# Altium PCB Fish and Microchips PCB.PcbDoc
Units mil, origin at the board's own origin, x right, y up, seen from the top; angles counter-clockwise.
Board outline 1930 x 1665 mil, 2 copper layers (Top Layer, Bottom Layer); 32 components, 24 nets, 135 pads, 23 vias.
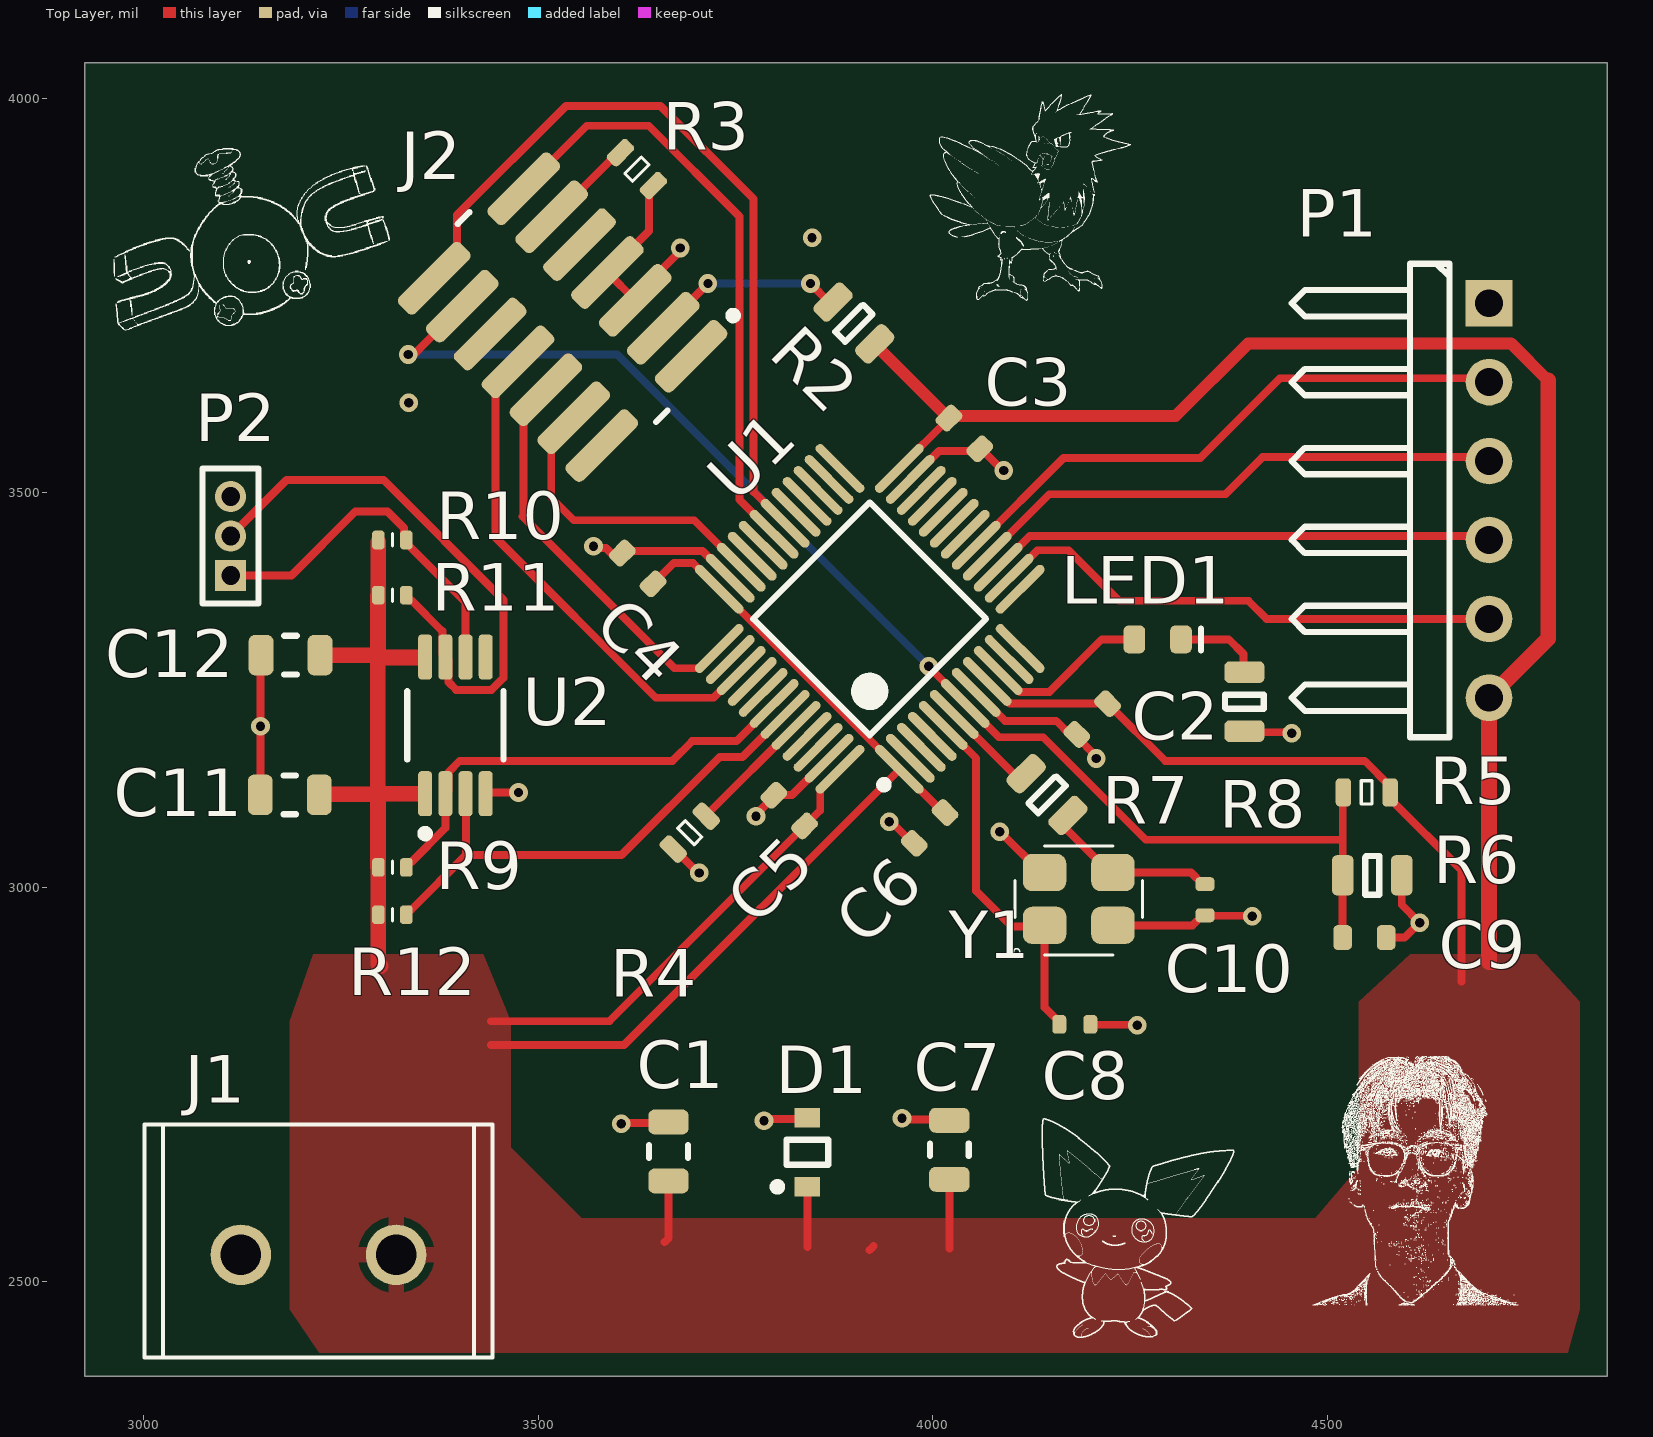
[diagram p0: Top Layer view]
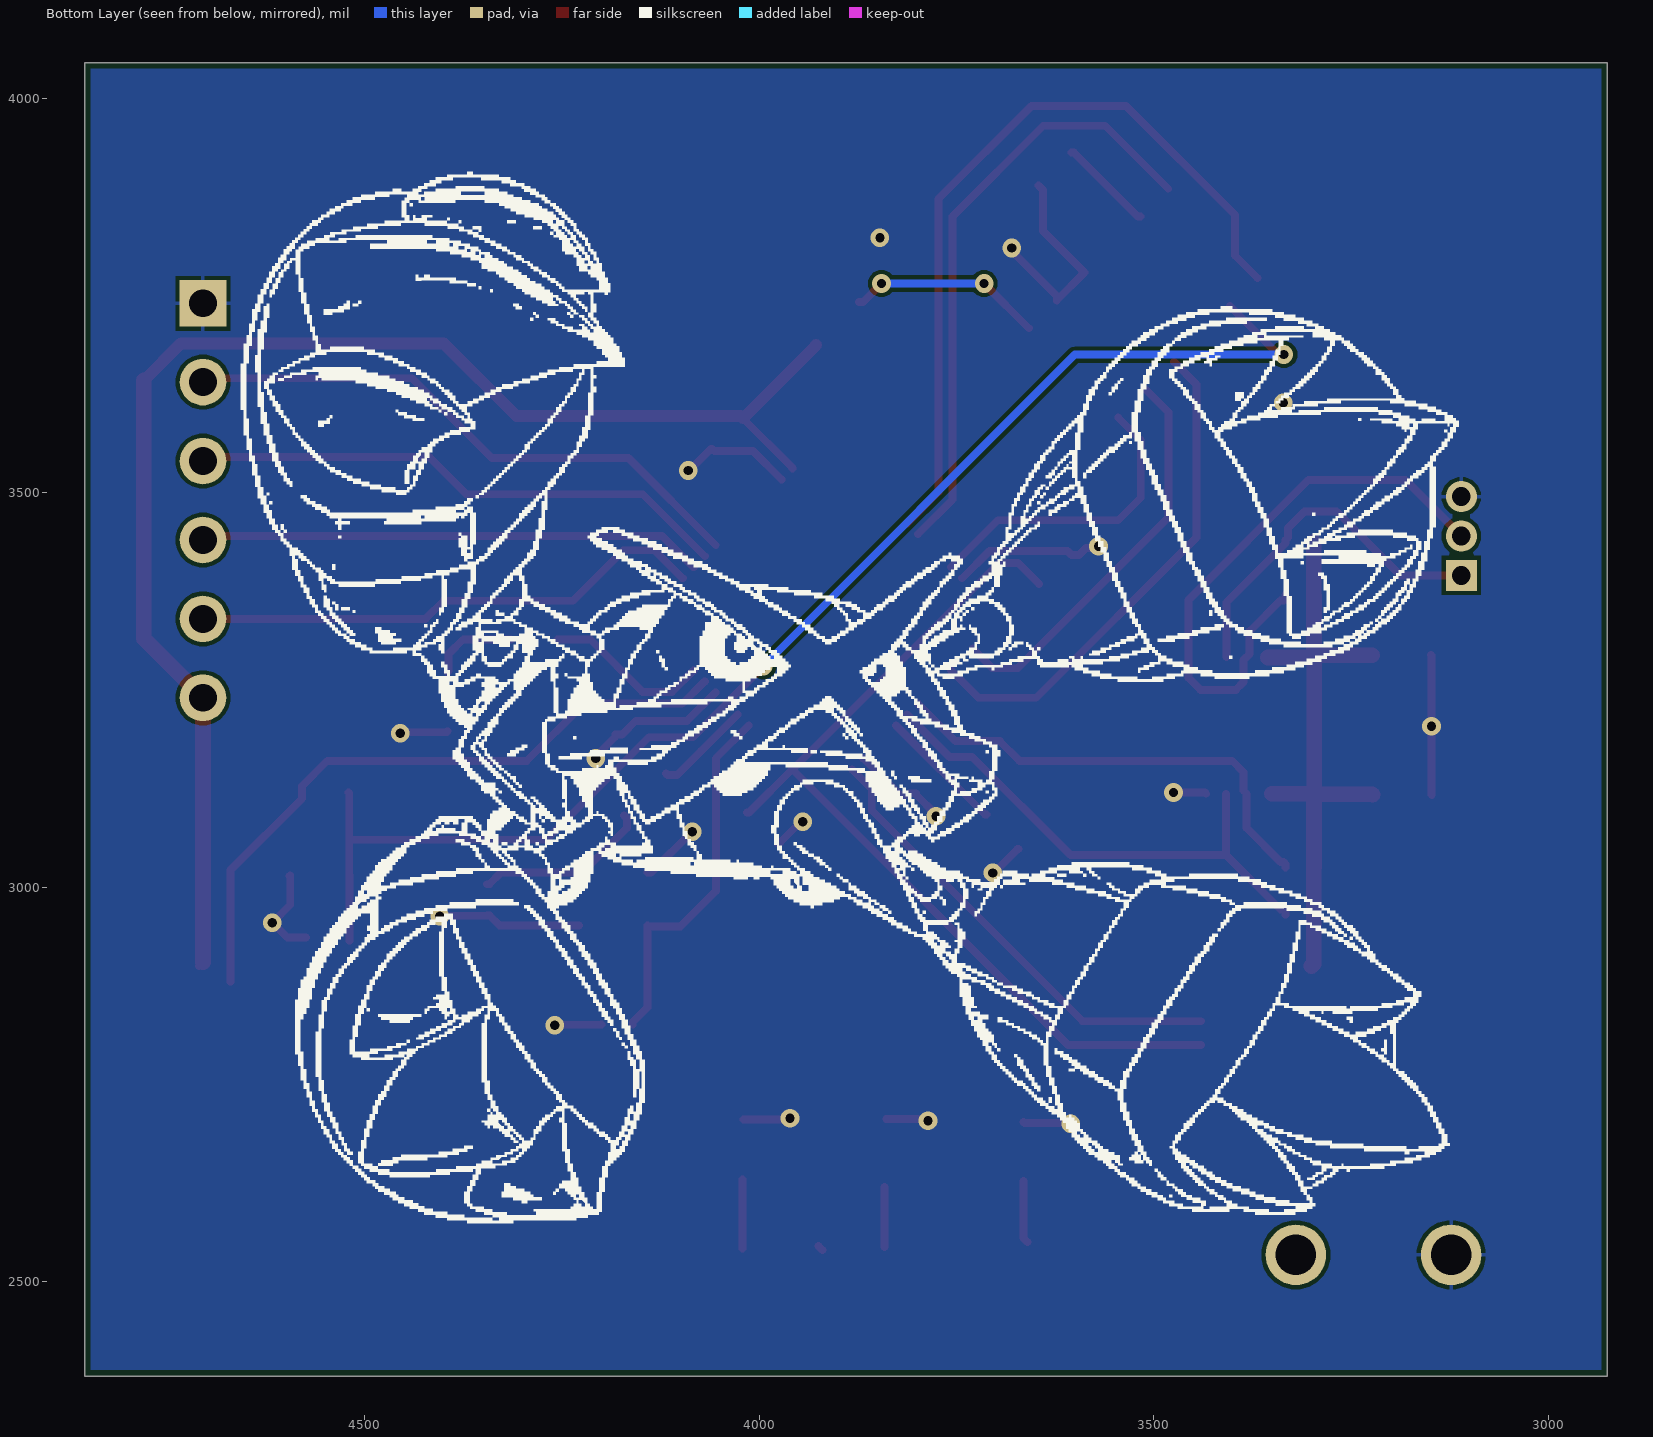
[diagram p1: Bottom Layer view, seen from below]
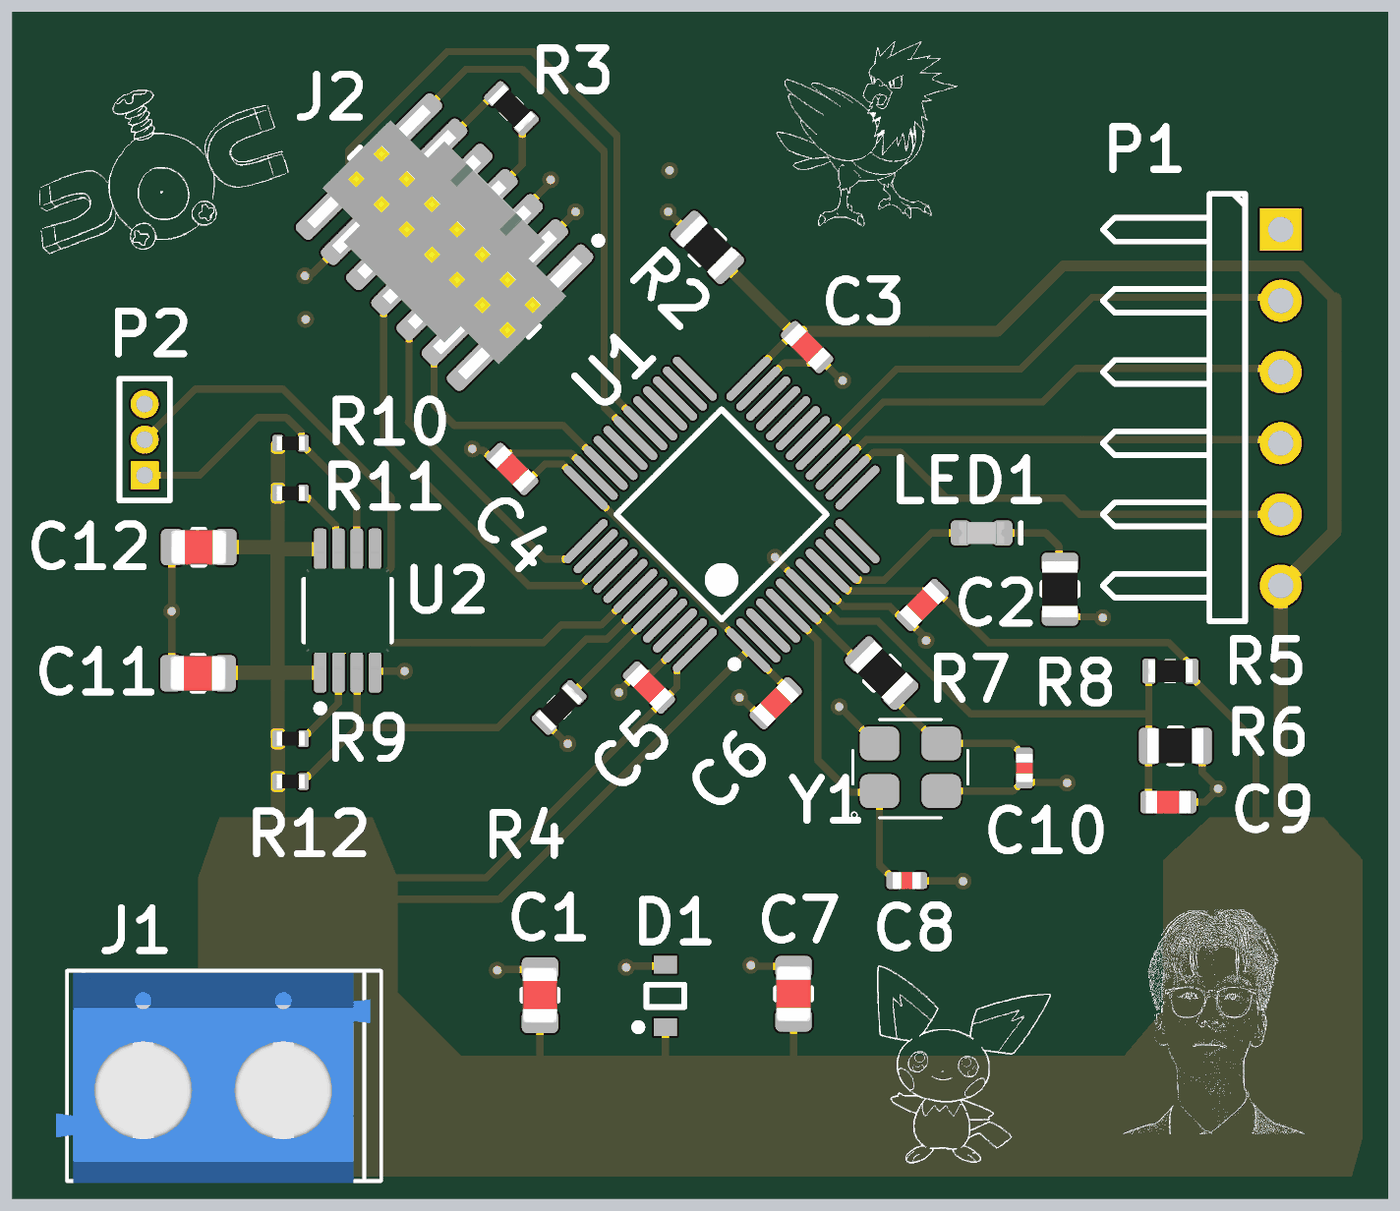
[diagram p2: 3D render of the assembled board from above, using the file's embedded part models]

## Layer stack, top to bottom
Top Solder: solder mask 0.4, Solder Resist, Dk 3.5
Top Layer: signal copper 1.4
Dielectric 1: dielectric 12.6, FR-4, Dk 4.8
Bottom Layer: signal copper 1.4
Bottom Solder: solder mask 0.4, Solder Resist, Dk 3.5

## Board outline
2925,2380 2925,4045 4855,4045 4855,2380

## Design rules (kind name [scope] priority, off if disabled: settings)
BoardOutlineClearance [All] p1: gap=7.87 ignorepadtopadclearanceinfootprint=FALSE
Clearance [All] p1: gap=5 ignorepadtopadclearanceinfootprint=FALSE except(9.84: Arc-Hole Track-Hole SMDPad-Hole THPad-Hole Via-Hole Fill-Hole Poly-Hole Region-Hole Text-Hole)
ComponentClearance [All] p1: gap=5 collisioncheckmode=3 verticalgap=5 showdistances=TRUE
DiffPairsRouting [All] p1: maxlimit=10 minlimit=5 mostfreqgap=5 toplayer_minwidth=5 toplayer_maxwidth=1000 toplayer_prefwidth=5 bottomlayer_minwidth=5 bottomlayer_maxwidth=1000 bottomlayer_prefwidth=5 maxuncoupledlength=500
Height [All] p1: minheight=0 maxheight=71497.94 prefheight=500
HoleSize [All] p1: absolutevalues=TRUE maxlimit=248.03 minlimit=11.81 maxpercent=80.000 minpercent=20.000
HoleToHoleClearance [All] p1: gap=9.84 allowstackedmicrovias=FALSE
MinimumAnnularRing [All] p1: minimumring=3
MinimumSolderMaskSliver [All] p1: minsoldermaskwidth=0
PlaneClearance [All] p1: clearance=5
PlaneConnect PlaneConnectPowerPads [InPadClass('PowerPads')] p1: planeconnectstyle=Direct reliefexpansion=20 reliefentries=4 reliefconductorwidth=10 reliefairgap=10
PlaneConnect [All] p2: pad.planeconnectstyle=Relief pad.reliefexpansion=11.81 pad.reliefentries=4 pad.reliefconductorwidth=5 pad.reliefairgap=5 via.planeconnectstyle=Direct via.reliefexpansion=11.81 via.reliefentries=4 via.reliefconductorwidth=5 via.reliefairgap=5
PolygonConnect PolygonConnectPowerPads [All vs (InPadClass('PowerPads'))] p1: connectstyle=Direct reliefconductorwidth=10 reliefentries=4 polygonreliefangle="90 Angle" airgapwidth=10
PolygonConnect [All] p2: thpad.connectstyle=Relief thpad.reliefconductorwidth=5 thpad.reliefentries=4 thpad.polygonreliefangle="90 Angle" thpad.airgapwidth=5 smdpad.connectstyle=Relief smdpad.reliefconductorwidth=5 smdpad.reliefentries=4 smdpad.polygonreliefangle="90 Angle" smdpad.airgapwidth=5 via.connectstyle=Direct via.reliefconductorwidth=5 via.reliefentries=4 via.polygonreliefangle="90 Angle" via.airgapwidth=5
RoutingVias [All] p1: holewidth=11.81 width=23.62 viastyle="Through Hole" minholewidth=11.81 minwidth=23.62 maxholewidth=23.62 maxwidth=259.84
SilkToSilkClearance [All] p1: silktosilkclearance=0
SilkToSolderMaskClearance [IsPad] p1: minsilkscreentomaskgap=5 clearancetoexposedcopper=TRUE
SolderMaskExpansion [All] p1: expansion=2.95 istentingtop=FALSE
SupplyNets "Schematic Supply Nets_1" [InNet('3V3')] p1: voltage=0.000
SupplyNets "Schematic Supply Nets" [InNet('GND')] p2: voltage=0.000
Width [All] p1: maxlimit=1000 minlimit=5 preferedwidth=5 minimp=50.000000 maximp=50.000000 favimp=50.000000
20 further rules are at their usual default settings.

## Components (designator, comment, footprint, x,y, rotation, side; value= is the part's Value field where it differs from the comment)
C1 "GCM21BR71C225KA64L" CAP0805R 3665,2665 r270 top value=2.2µF
C2 "CGA3E2X7R1E104K080AA" CAP0603R 4202,3213 r45 top value=100nF
C3 "CGA3E2X7R1E104K080AA" CAP0603R 4040,3575 r135 top value=100nF
C4 "CGA3E2X7R1E104K080AA" CAP0603R 3626.02,3403.86 r315 top value=100nF
C5 "CGA3E2X7R1E104K080AA" CAP0603R 3818,3097 r315 top value=100nF
C6 "CGA3E2X7R1E104K080AA" CAP0603R 3996,3075 r45 top value=100nF
C7 "GCM21BR71C105KA58L" CAP0805R 4021,2667 r270 top value=1µF
C8 "GCQ1555C1H100JB01D" CAP0402R 4180,2826 r0 top value=10pF
C9 "CGA3E2X7R1E104K080AA" CAP0603R 4547,2936 r180 top value=100nF
C10 "GCQ1555C1H100JB01D" CAP0402R 4345,2984 r90 top value=10pF
C11 "LMK212B7105KGHTR" CAP0805R 3185,3117 r0 top value=1µF
C12 "LMK212B7105KGHTR" CAP0805R 3186,3294 r0 top value=1µF
D1 "3V3" ONSC-SOD-323-2-477-02_V 3841,2664 r90 top
J1 "691102710002" CON2_SCREW_5.00MM_691102710002 3221.43,2534 r0 top
J2 "FTSH-107-01-L-DV-K" FP-FTSH-107-01-L-DV-K-MFG 3530.94,3722.36 r135 top
LED1 "LT Q39E-Q1OO-25-1" LED0603 4285,3314 r180 top
P1 "Header 6H" HDR1X6H 4705,3740 r270 top
P2 "MHDR1X3" MHDR1X3 3110,3395 r90 top
R2 "ERJ-6GEY0R00V" RES0805R 3900,3715 r135 top value=0
R3 "ERJ-3GEYJ101V" RES0603R 3625,3910 r135 top value=100
R4 "ERJ-3GEYJ103V" RES0603R 3692,3069 r225 top value=10k
R5 "ERJ-3GEYJ103V" RES0603R 4550,3120 r0 top value=10k
R6 "ERJ-6GEY0R00V" RES0805R 4557,3015 r180 top value=0
R7 "ERJ-6GEY0R00V" RES0805R 4144.81,3117.36 r135 top value=0
R8 "CRCW08051K00FKTC" RES0805R 4395,3235 r270 top value=1k
R9 "ERJ-2GEJ472X" RES0402R 3315,3025 r180 top value=4.7k
R10 "ERJ-2GEJ472X" RES0402R 3315,3440 r180 top value=4.7k
R11 "ERJ-2GEJ472X" RES0402R 3315,3370 r180 top value=4.7k
R12 "ERJ-2GEJ472X" RES0402R 3315,2965 r180 top value=4.7k
U1 "STM32F103C8T6" STM-LQFP48_M 3920,3340 r135 top
U2 "TCA9517DGKRQ1" FP-DGK0008A-MFG 3395,3205 r90 top
Y1 "X322516MLB4SI" X322516MLB4SI-Footprint-1 4185,2985 r0 top

## Footprints (in the part's own frame and the unit in brackets; to place one, negate y for a bottom-side part, rotate by r counter-clockwise, add the part's x,y. Pads: shape width x height; smd on the part's side, far side on the other; paste and mask are expansions set on the pad)
CAP0402R [mm] "Capacitor 0402 reflow soldering"
  rrect50% 0.45x0.6 smd: 1(-0.5,0) 2(0.5,0)
  body extent -0.5,-0.3 0.5,0.3, height 0.2
CAP0603R [mm] "capacitor 0603 reflow soldering"
  rrect50% 0.6x0.8 smd: 1(-0.7,0) 2(0.7,0)
  body extent -0.8,-0.4 0.8,0.4, height 0.3
CAP0805R [mm] "capacitor 0805 reflow soldering"
  rrect50% 0.8x1.3 smd: 1(-0.95,0) 2(0.95,0)
  silkscreen extent -0.2,-0.63 0.2,0.63, body extent -1,-0.62 1,0.63, height 0.78
CON2_SCREW_5.00MM_691102710002 [mm] "2-Pos Screw terminal 5mm pitch"
  round 1.95 hole 1.3: 1(-2.5,0) 2(2.5,0)
  silkscreen extent -5.6,-3.3 5.6,4.2, body extent -5.98,-3.37 5.22,4.13, height 10.03
FP-DGK0008A-MFG [mm]
  rrect50% 1.45x0.45 smd: 1(-2.2,0.975) 2(-2.2,0.325) 3(-2.2,-0.325) 4(-2.2,-0.975) 5(2.2,-0.975) 6(2.2,-0.325) 7(2.2,0.325) 8(2.2,0.975)
  silkscreen extent -3.61,-1.55 1.1,1.55, body extent -3.03,-1.8 3.03,1.8, height 0.25
FP-FTSH-107-01-L-DV-K-MFG [mm]
  rrect50% 0.74x2.79 smd: 1(-3.81,-2.035) 2(-3.81,2.035) 3(-2.54,-2.035) 4(-2.54,2.035) 5(-1.27,-2.035) 6(-1.27,2.035) 7(0,-2.035) 8(0,2.035) 9(1.27,-2.035) 10(1.27,2.035) 11(2.54,-2.035) 12(2.54,2.035) 13(3.81,-2.035) 14(3.81,2.035)
  silkscreen extent -4.51,-4.04 4.51,0.27, body extent -4.61,-3.53 4.61,3.53, height 0.25
HDR1X6H [mm] "Connector; Header; 6 Position; Right Angle"
  rect 1.5x1.5 hole 0.9: 1(0,0)
  round 1.5 hole 0.9: 2(2.54,0) 3(5.08,0) 4(7.62,0) 5(10.16,0) 6(12.7,0)
  silkscreen extent -1.27,-6.35 13.97,-1.27
LED0603 [mm] "0603 LED footprint, thick line on the cathode"
  rrect50% 0.7x0.9 smd: 1(-0.75,0) 2(0.75,0)
  silkscreen extent -1.4,-0.35 -1.4,0.35, body extent -0.8,-0.4 0.8,0.4, height 0.34
MHDR1X3 [mm] "Connector; Header; 3 Position"
  rect 1x1 hole 0.6: 1(0,0)
  round 1 hole 0.6: 2(1.27,0) 3(2.54,0)
  silkscreen extent -0.9,-0.9 3.44,0.9
ONSC-SOD-323-2-477-02_V [mm] "SOD, 2-Leads, Body 1.7x1.25mm"
  rect 0.63x0.83 smd: 1(-1.115,0) 2(1.115,0)
  silkscreen extent -1.24,-0.67 0.4,1.09, body extent -0.85,-0.63 0.85,0.63, height 1.06
RES0402R [mm] "resistor 0402 reflow soldering"
  rrect50% 0.4x0.6 smd: 1(-0.45,0) 2(0.45,0)
  silkscreen extent 0,-0.2 0,0.2, body extent -0.5,-0.25 0.5,0.25, height 0.3
RES0603R [mm] "resistor 0603 reflow soldering"
  rrect50% 0.5x0.9 smd: 1(-0.75,0) 2(0.75,0)
  silkscreen extent -0.18,-0.38 0.18,0.38, body extent -0.8,-0.4 0.8,0.4, height 0.45
RES0805R [mm] "resistor 0805 reflow soldering"
  rrect50% 0.7x1.3 smd: 1(-0.95,0) 2(0.95,0)
  silkscreen extent -0.23,-0.63 0.23,0.63, body extent -1,-0.63 1,0.62, height 0.5
STM-LQFP48_M [mm] "QFP, 48-Leads, Body 7x7mm, Pitch 0.5mm, IPC Low Density"
  oval 2.1x0.3 smd: 1(-4.1,2.75) 2(-4.1,2.25) 3(-4.1,1.75) 4(-4.1,1.25) 5(-4.1,0.75) 6(-4.1,0.25) 7(-4.1,-0.25) 8(-4.1,-0.75) 9(-4.1,-1.25) 10(-4.1,-1.75) 11(-4.1,-2.25) 12(-4.1,-2.75) 25(4.1,-2.75) 26(4.1,-2.25) 27(4.1,-1.75) 28(4.1,-1.25) 29(4.1,-0.75) 30(4.1,-0.25) 31(4.1,0.25) 32(4.1,0.75) 33(4.1,1.25) 34(4.1,1.75) 35(4.1,2.25) 36(4.1,2.75)
  oval 0.3x2.1 smd: 13(-2.75,-4.1) 14(-2.25,-4.1) 15(-1.75,-4.1) 16(-1.25,-4.1) 17(-0.75,-4.1) 18(-0.25,-4.1) 19(0.25,-4.1) 20(0.75,-4.1) 21(1.25,-4.1) 22(1.75,-4.1) 23(2.25,-4.1) 24(2.75,-4.1) 37(2.75,4.1) 38(2.25,4.1) 39(1.75,4.1) 40(1.25,4.1) 41(0.75,4.1) 42(0.25,4.1) 43(-0.25,4.1) 44(-0.75,4.1) 45(-1.25,4.1) 46(-1.75,4.1) 47(-2.25,4.1) 48(-2.75,4.1)
  silkscreen extent -4.22,-2.65 2.65,3.57, body extent -3.5,-3.5 3.5,3.5, height 1.6
X322516MLB4SI-Footprint-1 [mm]
  rrect50% 1.4x1.2 smd: 1(-1.1,-0.85) 2(1.1,-0.85) 3(1.1,0.85) 4(-1.1,0.85)
  silkscreen extent -2.1,-1.8 2.05,1.7, body extent -1.62,-1.25 1.63,1.25, height 0.7

## Part data
C1: library part CMP-024-000719-8, "CAP CER 2.2UF 16V X7R 0805", Case/Package="0805 (2012 Metric)", Manufacturer="Murata Electronics", Max Operating Temperature=125°C, Min Operating Temperature=-55°C, Rating=AEC-Q200, Supplier Part Number 1=490-4786-1-ND, Temperature Coefficient=X7R, Tolerance=10%, Voltage Rating=16V, ComponentLink1Description=Datasheet, ComponentLink1URL=https://psearch.en.murata.com/capacitor/product/GCM21BR71C225KA64%23.pdf, PN=GCM21BR71C225KA64L, Supplier 1=Digi-Key
C2 C3 C4 C5 C6 C9: library part CMP-024-000155-8, "CAP CER 0.1UF 25V X7R 0603", Case/Package="0603 (1608 Metric)", Manufacturer="TDK Corporation", Max Operating Temperature=125°C, Min Operating Temperature=-55°C, Rating=AEC-Q200, Supplier Part Number 1=445-5667-1-ND, Temperature Coefficient=X7R, Tolerance=10%, Voltage Rating=25V, ComponentLink1Description=Datasheet, ComponentLink1URL=https://product.tdk.com/info/en/catalog/datasheets/mlcc_automotive_general_en.pdf?ref_disty=digikey, PN=CGA3E2X7R1E104K080AA, Supplier 1=Digi-Key
C7: library part CMP-024-000717-8, "CAP CER 1UF 16V X7R 0805", Case/Package="0805 (2012 Metric)", Manufacturer="Murata Electronics", Max Operating Temperature=125°C, Min Operating Temperature=-55°C, Rating=AEC-Q200, Supplier Part Number 1=490-14437-1-ND, Temperature Coefficient=X7R, Tolerance=10%, Voltage Rating=16V, ComponentLink1Description=Datasheet, ComponentLink1URL=https://search.murata.co.jp/Ceramy/image/img/A01X/G101/ENG/GCM21BR71C105KA58-01.pdf, PN=GCM21BR71C105KA58L, Supplier 1=Digi-Key
C8 C10: library part CMP-024-000761-8, "CAP CER 10PF 50V C0G/NP0 0402", Case/Package="0402 (1005 Metric)", Manufacturer="Murata Electronics", Max Operating Temperature=125°C, Min Operating Temperature=-55°C, Rating=AEC-Q200, Supplier Part Number 1=490-17423-1-ND, Temperature Coefficient="C0G, NP0", Tolerance=5%, Voltage Rating=50V, ComponentLink1Description=Datasheet, ComponentLink1URL=https://search.murata.co.jp/Ceramy/image/img/A01X/G101/ENG/GCQ1555C1H100JB01-01.pdf, PN=GCQ1555C1H100JB01D, Supplier 1=Digi-Key
C11 C12: library part CMP-024-001219-8, "CAP CER 1UF 10V X7R 0805", Case/Package="0805 (2012 Metric)", Manufacturer="Taiyo Yuden", Max Operating Temperature=125°C, Min Operating Temperature=-55°C, Rating=AEC-Q200, Supplier Part Number 1=587-6338-1-ND, Temperature Coefficient=X7R, Tolerance=10%, Voltage Rating=10V, ComponentLink1Description=Datasheet, ComponentLink1URL=https://www.yuden.co.jp/productdata/catalog/mlcc_all_hq_e.pdf, PN=LMK212B7105KGHTR, Supplier 1=Digi-Key
D1: library part CMP-004-00015-1, "Zener Diode, 3.3V V(Z), 6%, 0.3W, Silicon, Unidirectional", Max Operating Temperature=150°C, RoHS Compliant=Yes
J1: library part CMP-027-000000-1, "2 Position Wire to Board Terminal Block Horizontal with Board 0.197\" (5.00mm) Through Hole", Manufacturer="Würth Elektronik", Supplier Part Number 1=732-2028-ND, ComponentLink1Description=Datasheet, ComponentLink1URL=https://www.we-online.de/katalog/datasheet/6911027100xx.pdf, Connector Type="Screw Terminal", Contact Type=Wire, Number of Positions=2, Number of Rows=1, Pitch - Mating="0.197\" (5.00mm)", PN=691102710002, Series="WR-TBL Series 102", Supplier 1=Digi-Key
J2: library part CMP-002-00034-3, "Conn Unshrouded Header HDR 14 POS 1.27mm Solder ST Top Entry SMD TIGER CLAW™ Tube", Current Rating=3.4A, Max Operating Temperature=125°C, Min Operating Temperature=-55°C, Contact Material=Bronze, Gender=Male, Number of Contacts=14, Number of Rows=2, Pitch=1.27mm
LED1: library part CMP-029-000017-3, "LED GREEN DIFFUSED 0603 SMD", Color=Green, Current - Average=5mA, Manufacturer="OSRAM Opto Semiconductors Inc.", Package="0603 (1608 Metric)", Supplier Part Number 1=475-3441-1-ND, Voltage - Forward Max=2.85V, ComponentLink1Description=Datasheet, ComponentLink1URL=https://dammedia.osram.info/media/resource/hires/osram-dam-2493475/LT%20Q39E.pdf, PN="LT Q39E-Q1OO-25-1", Supplier 1=Digi-Key, Type=LED
P1: library part CMP-083-000108-1, "Header, 6-Pin, Right Angle", Component Type=Standard, Design Item ID="Header 6H", LatestRevisionDate=17-Jul-2002, LatestRevisionNote="Re-released for DXP Platform.", Pin Count=6, Publisher="Altium Limited", Source="Miscellaneous Connectors.SchLib"
P2: library part CMP-083-000139-1, "Header, 3-Pin", Component Type=Standard, Design Item ID=MHDR1X3, LatestRevisionDate=17-Jul-2002, LatestRevisionNote="Re-released for DXP Platform.", Pin Count=3, Publisher="Altium Limited", Source="Miscellaneous Connectors.SchLib"
R2 R6 R7: library part CMP-054-002879-6, "RES SMD 0 OHM JUMPER 1/8W 0805", Case/Package="0805 (2012 Metric)", Manufacturer=Panasonic, Max Operating Temperature=155°C, Min Operating Temperature=-55°C, Power=125mW, Rating=AEC-Q200, Supplier Part Number 1=P0.0ACT-ND, Tolerance=0%, ComponentLink1Description=Datasheet, ComponentLink1URL=http://industrial.panasonic.com/www-cgi/jvcr13pz.cgi?E+PZ+3+AOA0001+ERJ6GEY0R00V+7+WW, Composition="Thick Film", PN=ERJ-6GEY0R00V, Supplier 1=Digi-Key
R3: library part CMP-054-002817-6, "RES SMD 100 OHM 5% 1/10W 0603", Case/Package="0603 (1608 Metric)", Manufacturer=Panasonic, Max Operating Temperature=155°C, Min Operating Temperature=-55°C, Power=100mW, Rating=AEC-Q200, Supplier Part Number 1=P100GCT-ND, Tolerance=5%, ComponentLink1Description=Datasheet, ComponentLink1URL=http://industrial.panasonic.com/www-cgi/jvcr13pz.cgi?E+PZ+3+AOA0001+ERJ3GEYJ101V+7+WW, Composition="Thick Film", PN=ERJ-3GEYJ101V, Supplier 1=Digi-Key
R4 R5: library part CMP-054-002819-6, "RES SMD 10K OHM 5% 1/10W 0603", Case/Package="0603 (1608 Metric)", Manufacturer=Panasonic, Max Operating Temperature=155°C, Min Operating Temperature=-55°C, Power=100mW, Rating=AEC-Q200, Supplier Part Number 1=P10KGCT-ND, Tolerance=5%, ComponentLink1Description=Datasheet, ComponentLink1URL=http://industrial.panasonic.com/www-cgi/jvcr13pz.cgi?E+PZ+3+AOA0001+ERJ3GEYJ103V+7+WW, Composition="Thick Film", PN=ERJ-3GEYJ103V, Supplier 1=Digi-Key
R8: library part CMP-054-001714-6, "RES SMD 1K OHM 1% 1/8W 0805", Case/Package="0805 (2012 Metric)", Manufacturer="Vishay Dale", Max Operating Temperature=155°C, Min Operating Temperature=-55°C, Power=125mW, Rating=AEC-Q200, Supplier Part Number 1=541-4320-1-ND, Tolerance=1%, ComponentLink1Description=Datasheet, ComponentLink1URL=https://www.vishay.com/docs/20008/dcrcw.pdf, Composition="Thick Film", PN=CRCW08051K00FKTC, Supplier 1=Digi-Key
R9 R10 R11 R12: library part CMP-054-002447-6, "RES SMD 4.7K OHM 5% 1/10W 0402", Case/Package="0402 (1005 Metric)", Manufacturer=Panasonic, Max Operating Temperature=155°C, Min Operating Temperature=-55°C, Power=100mW, Rating=AEC-Q200, Supplier Part Number 1=P4.7KJCT-ND, Tolerance=5%, ComponentLink1Description=Datasheet, ComponentLink1URL=https://b2b-api.panasonic.eu/file_stream/pids/fileversion/1242, Composition="Thick Film", PN=ERJ-2GEJ472X, Supplier 1=Digi-Key
U1: library part CMP-00007-1, "RISC Microcontroller, 32-Bit, FLASH, STM32 CPU, 72MHz, CMOS, PQFP48", Case/Package=LFQFP, Clock Frequency=16MHz, Max Operating Temperature=105°C, Max Supply Current=50mA, Max Supply Voltage=3.6V, Min Operating Temperature=-40°C, Min Supply Voltage=2V, Nominal Supply Voltage=3.3V, Package Body Material=Plastic, Package Equivalence Code=QFP48,.35SQ,20, Package Shape=Square, Peak Reflow Temperature (Cel)=260°C, Power Supplies=2.5/3.3, Temperature Grade=INDUSTRIAL, Time @ Peak Reflow Temperature-Max (s)=30s, Height - Seated (Max)=1.6mm, Interface=I2C,SPI,USB,CAN,USART, JESD-30 Code=S-PQFP-G48, JESD-609 Code=e4, Length=7mm, Moisture Sensitivity Level=2, Number of I/O Lines=37, Peripherals=POR,DMA, Pins=48, Qualification Status="Not Qualified", Reach SVHC Compliant=Yes, RoHS Compliant=Yes, Surface Mount=Yes, Technology=CMOS, Terminal Finish=Nickel, Terminal Form="Gull Wing", Terminal Pitch=0.5mm, Terminal Position=QUAD, Width=7mm
U2: library part CMP-015-00008-5, "Voltage Level Translator Bidirectional 1 Circuit 2 Channel 8-VSSOP", Case/Package=VSSOP, Frequency=400kHz, Max Operating Temperature=125°C, Min Operating Temperature=-40°C, Channel Type=Bidirectional
Y1: library part CMP-003-00003-2, "16MHz Surface Mount Crystal 9pF ±10ppm ±20ppm SMD3225-4P Crystals ROHS", Frequency=16MHz

## Via types
v1: diameter 23.62, hole 11.81, Top Layer to Bottom Layer, tented both sides, 23 vias

## Nets (pads, with @x,y where several pads share a name; then routed paths per layer and width w, separated by ;. In a path a pad name is that pad's centre, name@x,y a point inside that pad or via, vN(x,y) a via of type N, cw(c..) or ccw(c..) an arc to the next point about the centre after c; other vN are vias at no path point)
3V3: C1.2 C2.2 C3.2 C4.2 C5.2 C6.2 C7.2 C11.2 C12.2 D1.1 J1.2 P1.6 R2.1 R5.2 R9.2 R10.2 R11.2 R12.2 U1.1 U1.9 U1.24 U1.36 U1.48 U2.1 U2.8 | length 5477.5
  Top Layer w10: 3440,2800 3608.77,2800 3958.07,3149.3 4012.89,3094.49 C6.2 ; 3440,2830 3590.05,2830 3857.36,3097.31 3857.36,3124.25 U1.48 ; C4.2 3672.13,3411 3695.89,3411 U1.36 U1.1 ; 3660,2550 3665,2555 C1.2 ; 3841,2544 D1.1 ; 3920,2540 3925,2545 ; R2.1 3926.45,3687.55 3927,3687 R2.1@3928,3687 ; U1.24 3957.58,3531.13 C3.2@4020.73,3594.27 ; 4021,2542 C7.2 ; U1.9 4069.43,3260.66 4097.6,3232.49 4207.08,3232.49 4209.52,3234.92 C2.2@4219.05,3234.92 ; C2.2@4222.13,3232.49 4294.62,3160 4547.4,3160 4579.53,3127.87 R5.2 4579.53,3112.13 4670,3021.65 4670,2880 ; 4705,2905 4710,2900
  Top Layer w15: R2.1@3928,3687 C3.2 ; C3.2@4023.73,3597.27 4307.8,3597.27 4399.53,3689 4733,3689 4780,3642
  Top Layer w20: C11.2 3223.25,3117.84 3296.89,3117.84 ; C12.2 3293.58,3294 3296.5,3291.09 ; R10.2@3297.28,3437.72 R11.2 3296.89,3369.61 3296.89,3291.48 3296.5,3291.09 ; 3300,2900 3297.28,2902.72 R12.2 R9.2 3296.89,3025.39 3296.89,3117.84 ; U2.1@3350,3118.39 3349.85,3118.24 3296.5,3118.24 ; U2.8@3355.47,3291.09 3296.5,3291.09 ; 4705,2905 P1.6 4780,3315 4780,3642 ; 3296.5,3118.24 3296.89,3117.84 ; 3296.5,3118.24 3296.5,3291.09
BUF_SCL: P2.2 R11.1 U2.7 | length 752
  Top Layer w10: P2.2 3181,3516 3304,3516 3456,3364 3456,3265.28 3440.72,3250 3395.92,3250 3386.06,3259.86 3386.06,3287.76 3378.35,3295.47 3378.35,3324.37 3339.53,3363.19 3335.59,3363.19 3332.72,3366.06 R11.1
BUF_SDA: P2.1 R10.1 U2.6 | length 453.9
  Top Layer w10: P2.1 3187.12,3395 3268.12,3476 3309,3476 3329.84,3455.16 3329.84,3442.87 R10.1 ; R10.1@3332.72,3436.06 3407.8,3360.98 U2.6
GND: C1.1 C2.1 C3.1 C4.1 C5.1 C6.1 C7.1 C8.2 C9.1 C10.1 C11.1 C12.1 D1.2 J1.1 J2.5 J2.7 P1.1 P2.3 R3.1 R4.2 R6.1 R8.2 U1.8 U1.23 U1.35 U1.47 U2.4 Y1.2 Y1.4 | length 1916.5
  Top Layer w10: C11.1 3148.1,3117.5 3148.1,3293.5 C12.1 ; U2.4 3435,3120 v1(3475,3120) ; v1(3570,3432) 3572.22,3429.78 3585.7,3429.78 3594.56,3420.91 3604.1,3420.91 3609.32,3426.13 3708.1,3426.13 3742.73,3391.5 U1.35 ; v1(3605,2700) 3606.2,2701.2 3663.8,2701.2 C1.1 ; R3.1 3640.31,3883.55 3640.31,3831.73 J2.7 J2.5 3622.95,3749.26 3680,3806.31 v1(3680,3810) ; R4.2 3672.5,3048.12 3702.62,3018 v1(3704,3018) ; v1(3776,3090) 3776,3091.99 3800.95,3116.94 3800.95,3118.92 3810.48,3118.92 3812.56,3116.85 3821.63,3116.85 3868.01,3163.22 U1.47 ; v1@3787.95,2705.95 D1.2@3839.05,2705.95 ; v1(3945,3083) 3945,3084 3946.01,3084 3974.5,3055.51 C6.1 ; v1@3962.3,2705.7 C7.1@4019.7,2705.7 ; U1.23 3971.99,3516.78 4007.94,3552.73 4056.7,3552.73 C3.1 4060.99,3555.51 4088.5,3528 v1(4090,3528) ; U1.8 4055.51,3246.74 4091.46,3210.79 4156.4,3210.79 4173.67,3193.51 C2.1 4182.51,3190.5 4207,3166.01 v1(4207,3163) ; v1(4085,3070) 4085.61,3070 4137.15,3018.46 Y1.4 ; C8.2 4200.19,2825.5 4258.5,2825.5 v1(4259,2825) ; Y1.2@4232.24,2951.54 Y1.2 4329.27,2951.54 4342.05,2964.32 C10.1 4345.66,2963.66 4404.34,2963.66 v1(4405,2963) ; R8.2 4396.3,3196.3 4453.7,3196.3 v1(4455,3195) ; C9.1 4598,2936 v1(4617,2955) 4594.4,2977.6 R6.1 R6.1@4595.2,3014.2
  other v1: 3786,2704 3961,2707 3148,3204 3336,3614 3847,3823
LED_PIN: LED1.2 U1.10 | length 211.4
  Top Layer w10: U1.10 4083.35,3274.58 4110.39,3247.54 4147.8,3247.54 4214.28,3314.02 LED1.2
MCU_SCL: R9.1 U1.42 U2.2 | length 593.8
  Top Layer w10: R9.1 3332.72,3028.94 3335.59,3031.81 3339.17,3031.81 3382.2,3074.84 U2.2 3386.06,3122.24 3386.06,3145.6 3400.46,3160 3670,3160 3695,3185 3751.08,3185 U1.42
MCU_SDA: R12.1 U1.43 U2.3 | length 664.9
  Top Layer w10: R12.1 3332.72,2968.94 3335.59,2971.81 3339.53,2971.81 3408.3,3040.58 ; U2.3@3408.3,3117.88 3408.3,3040.58 ; U1.43 3758.92,3165 3730,3165 3605.58,3040.58 3408.3,3040.58
NetC8_1: C8.1 U1.5 Y1.1 | length 466.5
  Top Layer w10: U1.5 4055,3163.24 4055,2995 4100,2950 4140.16,2950 Y1.1 4141.69,2847.57 4160.31,2828.95 C8.1
NetC10_2: C10.2 R7.1 Y1.3 | length 219.8
  Top Layer w10: R7.1 4167.69,3087.35 4167.69,3075.14 Y1.3@4224.07,3018.76 ; Y1.3 4327.27,3018.46 4342.05,3003.68 C10.2
NetJ2_3: J2.3 R2.2 | length 248.5
  Top Layer w10: J2.3 v1(3715,3765) ; v1(3845,3765) 3868.55,3741.45 R2.2
  Bottom Layer w10: v1(3715,3765) v1(3845,3765)
NetJ2_11: J2.11 R3.2 | length 120.9
  Top Layer w10: J2.11 3519.92,3849.73 3601.08,3930.88 R3.2
NetLED1_1: LED1.1 R8.1 | length 110.4
  Top Layer w10: LED1.1 4374.97,3314 ; 4374.98,3314.02 4393.68,3295.32 4393.68,3273.72 R8.1
NetP1_2: P1.2 U1.17 | length 739.8
  Top Layer w10: U1.17 4165.76,3544 4339,3544 4440,3645 4700,3645 P1.2
NetP1_3: P1.3 U1.16 | length 690.2
  Top Layer w10: U1.16 4147.6,3498 4371,3498 4418,3545 4700,3545 P1.3
NetP1_4: P1.4 U1.15 | length 640.6
  Top Layer w10: U1.15 4083.35,3405.42 4122.93,3445 4700,3445 P1.4
NetP1_5: P1.5 U1.14 | length 659
  Top Layer w10: U1.14 4097.27,3391.5 4132.77,3427 4172,3427 4236,3363 4400,3363 4423,3340 P1.5
NetR4_1: R4.1 U1.44 | length 161.7
  Top Layer w10: R4.1@3711.88,3091.88 3713.64,3091.88 U1.44
NetR7_2: R7.2 U1.6 | length 123.9
  Top Layer w10: U1.6 4073.77,3172.31 4104.21,3141.87 4116.42,3141.87 R7.2
RST: C9.2 J2.12 R5.1 R6.2 U1.7 | length 1721
  Top Layer w10: v1(3335,3675) 3337.61,3677.61 3344.76,3677.61 J2.12 ; v1(3995,3280) 3995,3279.41 4041.1,3233.31 U1.7 4083.92,3190 4140,3190 4270,3060 4517.28,3060 4518.6,3061.31 ; C9.2@4519.28,2932 4519.44,2932.16 4519.44,3014.84 R6.2 R5.1@4519.6,3119.13 ; R5.1@4520.31,3119.83 R5.1
  Bottom Layer w10: v1(3335,3675) 3600,3675 v1(3995,3280)
SWO: J2.8 U1.39 | length 644.2
  Top Layer w10: J2.8 3445.75,3637.18 3445.75,3443.25 3649,3240 3722.07,3240 3756.65,3274.58 U1.39
SYS_JTCK-SWCLK: J2.6 U1.37 | length 512
  Top Layer w10: J2.6 3481.11,3601.82 3481.11,3470.77 3480.17,3469.83 3672.64,3277.36 3704.25,3277.36 U1.37
SYS_JTMS-SWDIO: J2.4 U1.34 | length 390.5
  Top Layer w10: J2.4 3516.47,3566.47 3516.47,3493.53 3545,3465 3697.56,3465 U1.34
UART_RX: J2.13 U1.31 | length 775.2
  Top Layer w10: J2.13 3561.45,3965 3640,3965 3755,3850 3755,3491.08 U1.31
UART_TX: J2.14 U1.30 | length 1001.6
  Top Layer w10: J2.14 3396.76,3800.31 3396.76,3851.76 3535,3990 3655,3990 3772.98,3872.02 3772.98,3500.94 U1.30
pads on no net: J2.1 J2.2 J2.9 J2.10 U1.2 U1.3 U1.4 U1.11 U1.12 U1.13 U1.18 U1.19 U1.20 U1.21 U1.22 U1.25 U1.26 U1.27 U1.28 U1.29 U1.32 U1.33 U1.38 U1.40 U1.41 U1.45 U1.46 U2.5

## Polygon pours and split planes (outlines as drawn)
GND on Bottom Layer "GND Layer" (solid, pour order 0): 2925,4050 4855,4050 4855,2375 2925,2375
3V3 on Top Layer "3V3" (solid, pour order 5): 3185,2830 3185,2465 3222.4,2410 4804.6,2410 4820,2465 4820,2855 4765,2915 4605,2915 4540,2855 4540,2645 4485,2580 3555,2580 3465,2670 3465,2830 3430,2915 3215,2915

## Silkscreen, mask and mechanical layers (free items; w line width, h text height)
Top Overlay:
  drawing of 3269 lines, arcs and shapes, not listed
Bottom Overlay:
  drawing of 171 lines, arcs and shapes, not listed
Board Outline:
  the board outline again, w1

## Text inside footprints (layer, text, board x,y; h text height)
J1: Mechanical 4 "1" at 3077.72,2429.67 h73.82; Mechanical 4 "1" at 3077.72,2429.67 h73.82